# Altium PCB Quectel_EC600N-CN_R1.1_PCB_Footprint_AD_V1.0.PcbDoc
Units mm, origin at the board's own origin, x right, y up, seen from the top; angles counter-clockwise.
Board outline 152.4 x 101.6 mm, 2 copper layers (Top Layer, Bottom Layer); 1 components, 0 nets, 96 pads, 0 vias.
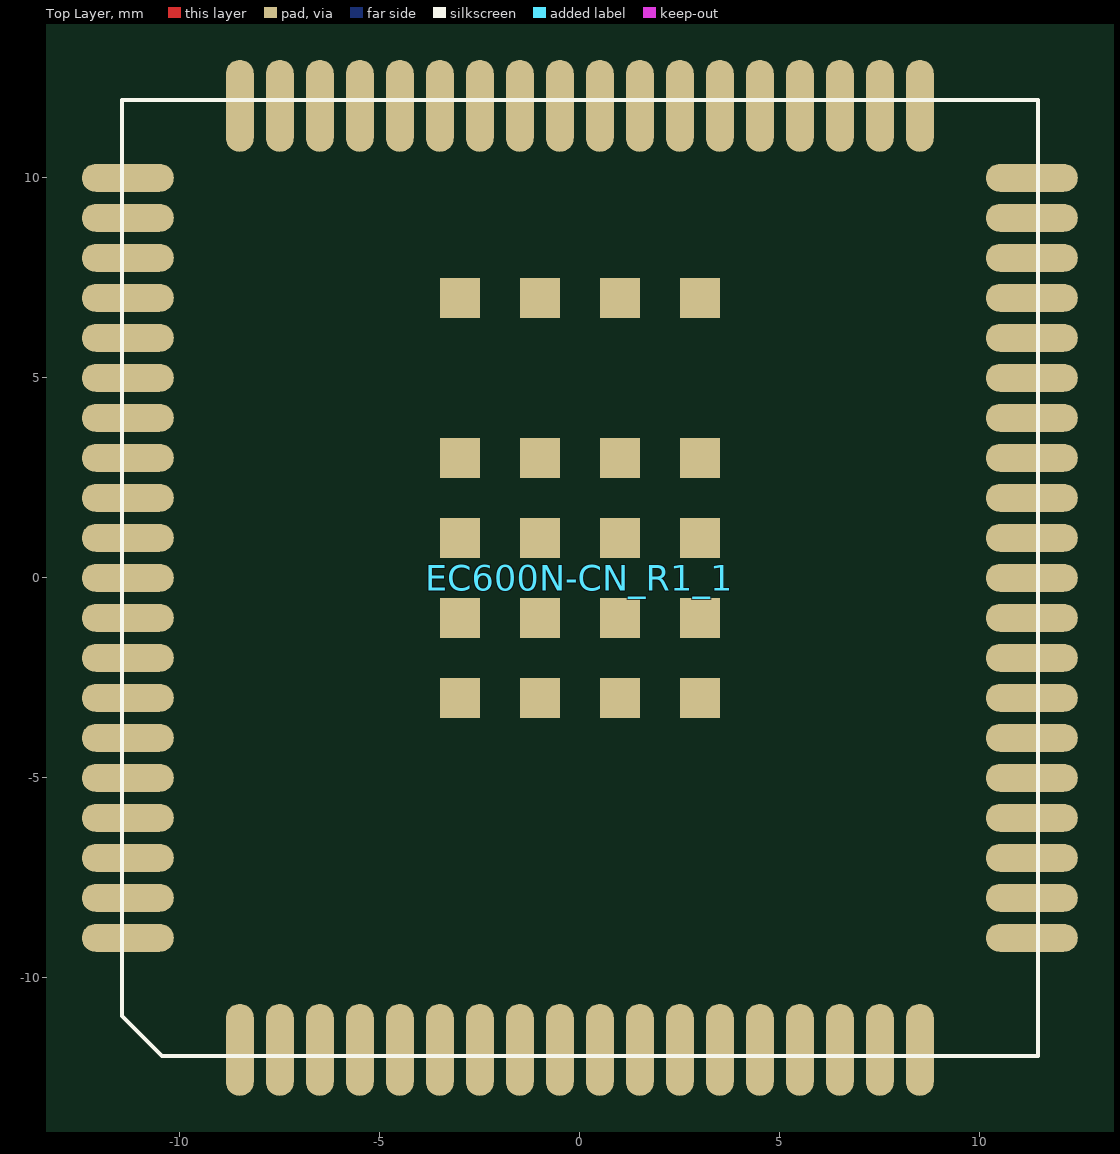
[diagram p0: Top Layer view]
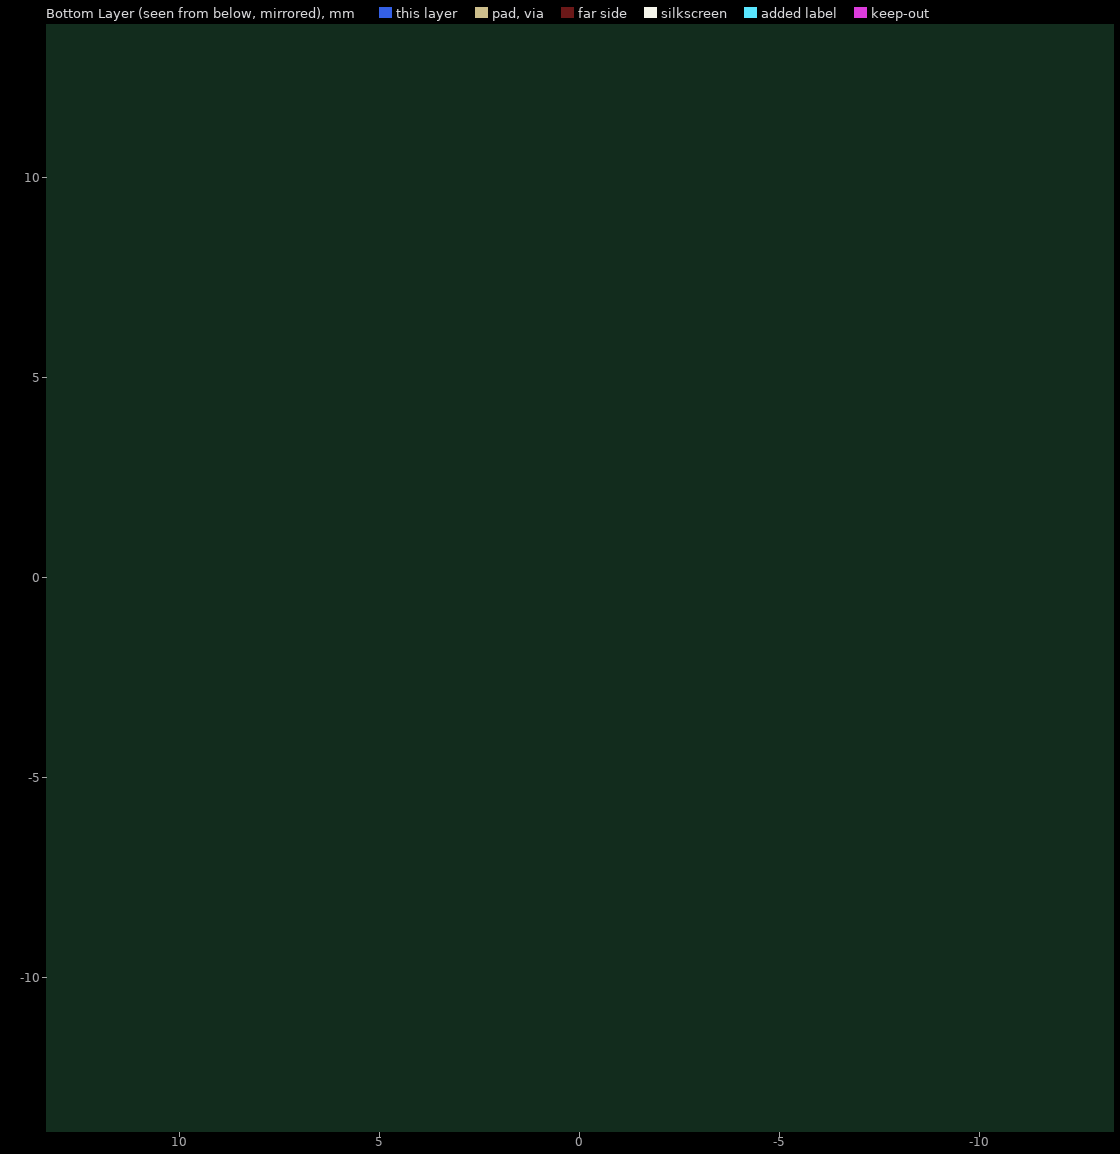
[diagram p1: Bottom Layer view, seen from below]

## Layer stack, top to bottom
Top Solder: solder mask 0.0102, Solder Resist, Dk 3.5
Top Layer: signal copper 0.0356
Dielectric1: dielectric 0.32, FR-4, Dk 4.8
Bottom Layer: signal copper 0.0356
Bottom Solder: solder mask 0.0102, Solder Resist, Dk 3.5

## Board outline
-70.739,-53.721 81.661,-53.721 81.661,47.879 -70.739,47.879

## Design rules (kind name [scope] priority, off if disabled: settings)
Clearance [All] p1: gap=0.254
PolygonConnect [All] p1: connectstyle=Relief reliefconductorwidth=0.254 reliefentries=4 polygonreliefangle="90 Angle" airgapwidth=0.254
RoutingVias [All] p1: holewidth=0.711 width=1.27 viastyle="Through Hole" minholewidth=0.711 minwidth=1.27 maxholewidth=0.711 maxwidth=1.27
SolderMaskExpansion [All] p1: expansion=0.102
Width [All] p1: maxlimit=0.254 minlimit=0.254 preferedwidth=0.254
30 further rules are at their usual default settings.

## Components (designator, comment, footprint, x,y, rotation, side; value= is the part's Value field where it differs from the comment)
EC600N-CN_R1_1 "Comment" EC600N-CN_R1_1 0,0 r0 top

## Footprints (in the part's own frame and the unit in brackets; to place one, negate y for a bottom-side part, rotate by r counter-clockwise, add the part's x,y. Pads: shape width x height; smd on the part's side, far side on the other; paste and mask are expansions set on the pad)
EC600N-CN_R1_1 [mm] "EC600N-CN_R1_1  Module 76LCC 20LGA 21.9x22.9mm H2.2mm RO"
  oval 0.7x2.3 smd mask+0.05: 1(-8.5,-11.8) 2(-7.5,-11.8) 3(-6.5,-11.8) 4(-5.5,-11.8) 5(-4.5,-11.8) 6(-3.5,-11.8) 7(-2.5,-11.8) 8(-1.5,-11.8) 9(-0.5,-11.8) 10(0.5,-11.8) 11(1.5,-11.8) 12(2.5,-11.8) 13(3.5,-11.8) 14(4.5,-11.8) 15(5.5,-11.8) 16(6.5,-11.8) 17(7.5,-11.8) 18(8.5,-11.8) 39(8.5,11.8) 40(7.5,11.8) 41(6.5,11.8) 42(5.5,11.8) 43(4.5,11.8) 44(3.5,11.8) 45(2.5,11.8) 46(1.5,11.8) 47(0.5,11.8) 48(-0.5,11.8) 49(-1.5,11.8) 50(-2.5,11.8) 51(-3.5,11.8) 52(-4.5,11.8) 53(-5.5,11.8) 54(-6.5,11.8) 55(-7.5,11.8) 56(-8.5,11.8)
  oval 2.3x0.7 smd mask+0.05: 19(11.3,-9) 20(11.3,-8) 21(11.3,-7) 22(11.3,-6) 23(11.3,-5) 24(11.3,-4) 25(11.3,-3) 26(11.3,-2) 27(11.3,-1) 28(11.3,0) 29(11.3,1) 30(11.3,2) 31(11.3,3) 32(11.3,4) 33(11.3,5) 34(11.3,6) 35(11.3,7) 36(11.3,8) 37(11.3,9) 38(11.3,10) 57(-11.3,10) 58(-11.3,9) 59(-11.3,8) 60(-11.3,7) 61(-11.3,6) 62(-11.3,5) 63(-11.3,4) 64(-11.3,3) 65(-11.3,2) 66(-11.3,1) 67(-11.3,0) 68(-11.3,-1) 69(-11.3,-2) 70(-11.3,-3) 71(-11.3,-4) 72(-11.3,-5) 73(-11.3,-6) 74(-11.3,-7) 75(-11.3,-8) 76(-11.3,-9)
  rect 1x1 smd mask+0.05: 77(-3,-3) 78(-1,-3) 79(1,-3) 80(3,-3) 81(3,-1) 82(3,1) 83(3,3) 84(1,3) 85(-1,3) 86(-3,3) 87(-3,1) 88(-3,-1) 89(-1,-1) 90(1,-1) 91(1,1) 92(-1,1) 145(3,7) 146(1,7) 147(-1,7) 148(-3,7)
  silkscreen extent -11.45,-11.95 11.45,11.95

## Nets (pads, with @x,y where several pads share a name; then routed paths per layer and width w, separated by ;. In a path a pad name is that pad's centre, name@x,y a point inside that pad or via, vN(x,y) a via of type N, cw(c..) or ccw(c..) an arc to the next point about the centre after c; other vN are vias at no path point)
pads on no net: EC600N-CN_R1_1.1 EC600N-CN_R1_1.2 EC600N-CN_R1_1.3 EC600N-CN_R1_1.4 EC600N-CN_R1_1.5 EC600N-CN_R1_1.6 EC600N-CN_R1_1.7 EC600N-CN_R1_1.8 EC600N-CN_R1_1.9 EC600N-CN_R1_1.10 EC600N-CN_R1_1.11 EC600N-CN_R1_1.12 EC600N-CN_R1_1.13 EC600N-CN_R1_1.14 EC600N-CN_R1_1.15 EC600N-CN_R1_1.16 EC600N-CN_R1_1.17 EC600N-CN_R1_1.18 EC600N-CN_R1_1.19 EC600N-CN_R1_1.20 EC600N-CN_R1_1.21 EC600N-CN_R1_1.22 EC600N-CN_R1_1.23 EC600N-CN_R1_1.24 EC600N-CN_R1_1.25 EC600N-CN_R1_1.26 EC600N-CN_R1_1.27 EC600N-CN_R1_1.28 EC600N-CN_R1_1.29 EC600N-CN_R1_1.30 EC600N-CN_R1_1.31 EC600N-CN_R1_1.32 EC600N-CN_R1_1.33 EC600N-CN_R1_1.34 EC600N-CN_R1_1.35 EC600N-CN_R1_1.36 EC600N-CN_R1_1.37 EC600N-CN_R1_1.38 EC600N-CN_R1_1.39 EC600N-CN_R1_1.40 EC600N-CN_R1_1.41 EC600N-CN_R1_1.42 EC600N-CN_R1_1.43 EC600N-CN_R1_1.44 EC600N-CN_R1_1.45 EC600N-CN_R1_1.46 EC600N-CN_R1_1.47 EC600N-CN_R1_1.48 EC600N-CN_R1_1.49 EC600N-CN_R1_1.50 EC600N-CN_R1_1.51 EC600N-CN_R1_1.52 EC600N-CN_R1_1.53 EC600N-CN_R1_1.54 EC600N-CN_R1_1.55 EC600N-CN_R1_1.56 EC600N-CN_R1_1.57 EC600N-CN_R1_1.58 EC600N-CN_R1_1.59 EC600N-CN_R1_1.60 EC600N-CN_R1_1.61 EC600N-CN_R1_1.62 EC600N-CN_R1_1.63 EC600N-CN_R1_1.64 EC600N-CN_R1_1.65 EC600N-CN_R1_1.66 EC600N-CN_R1_1.67 EC600N-CN_R1_1.68 EC600N-CN_R1_1.69 EC600N-CN_R1_1.70 EC600N-CN_R1_1.71 EC600N-CN_R1_1.72 EC600N-CN_R1_1.73 EC600N-CN_R1_1.74 EC600N-CN_R1_1.75 EC600N-CN_R1_1.76 EC600N-CN_R1_1.77 EC600N-CN_R1_1.78 EC600N-CN_R1_1.79 EC600N-CN_R1_1.80 EC600N-CN_R1_1.81 EC600N-CN_R1_1.82 EC600N-CN_R1_1.83 EC600N-CN_R1_1.84 EC600N-CN_R1_1.85 EC600N-CN_R1_1.86 EC600N-CN_R1_1.87 EC600N-CN_R1_1.88 EC600N-CN_R1_1.89 EC600N-CN_R1_1.90 EC600N-CN_R1_1.91 EC600N-CN_R1_1.92 EC600N-CN_R1_1.145 EC600N-CN_R1_1.146 EC600N-CN_R1_1.147 EC600N-CN_R1_1.148